# Altium PCB GC2USB.PcbDoc
Units mm, origin at the board's own origin, x right, y up, seen from the top; angles counter-clockwise.
Board outline 71.1 x 32.4 mm, 4 copper layers (Top, MidLayer1, MidLayer2, Bottom), stack 1.784 mm thick; 39 components, 23 nets, 154 pads, 49 vias.
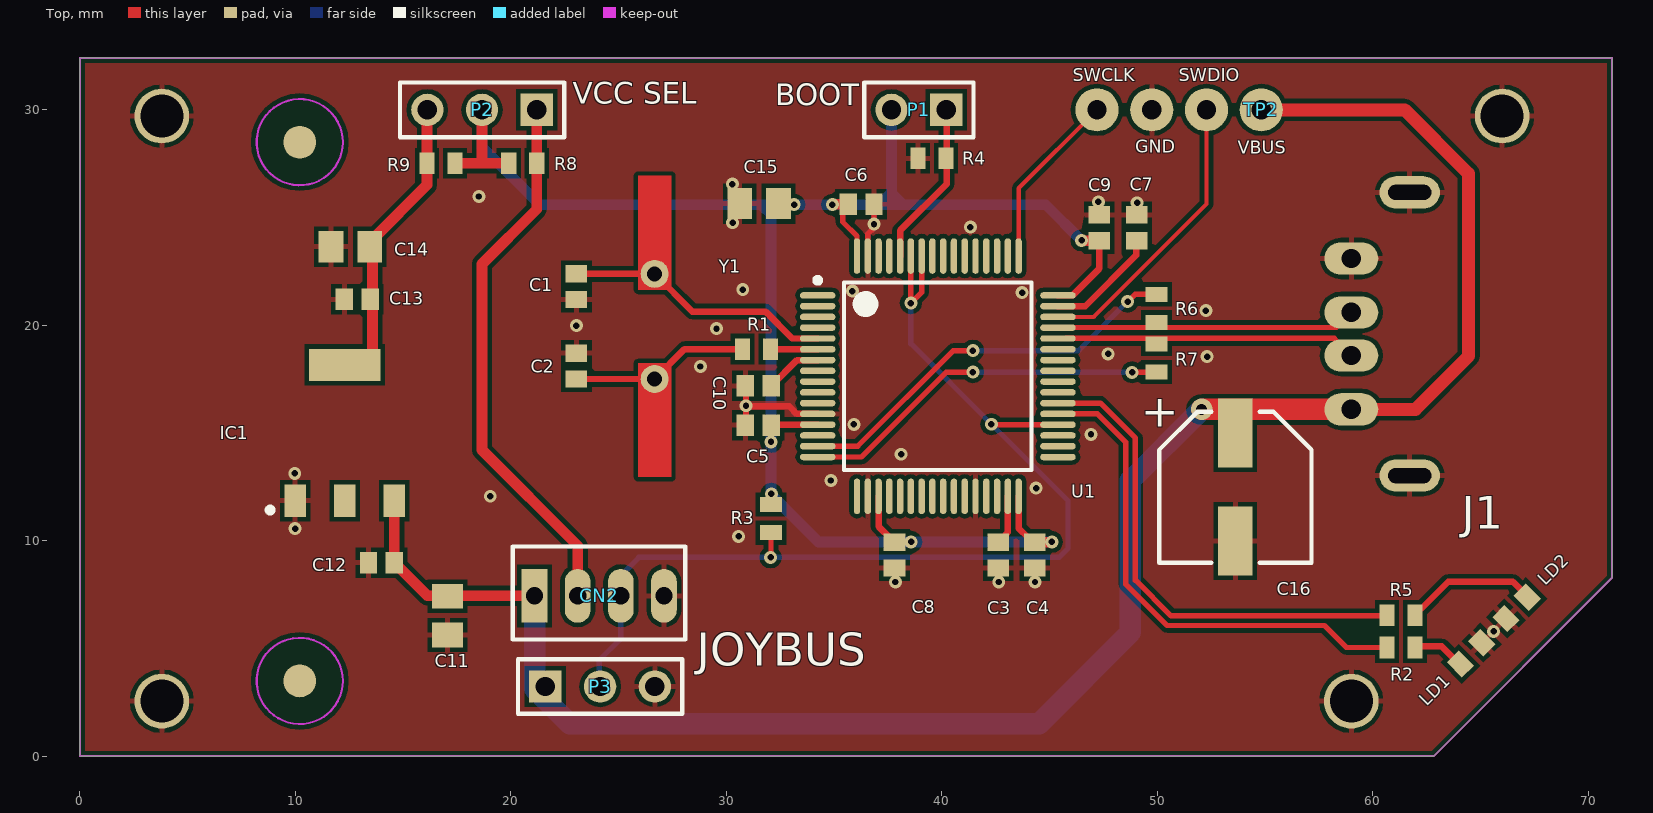
[diagram p0: Top view]
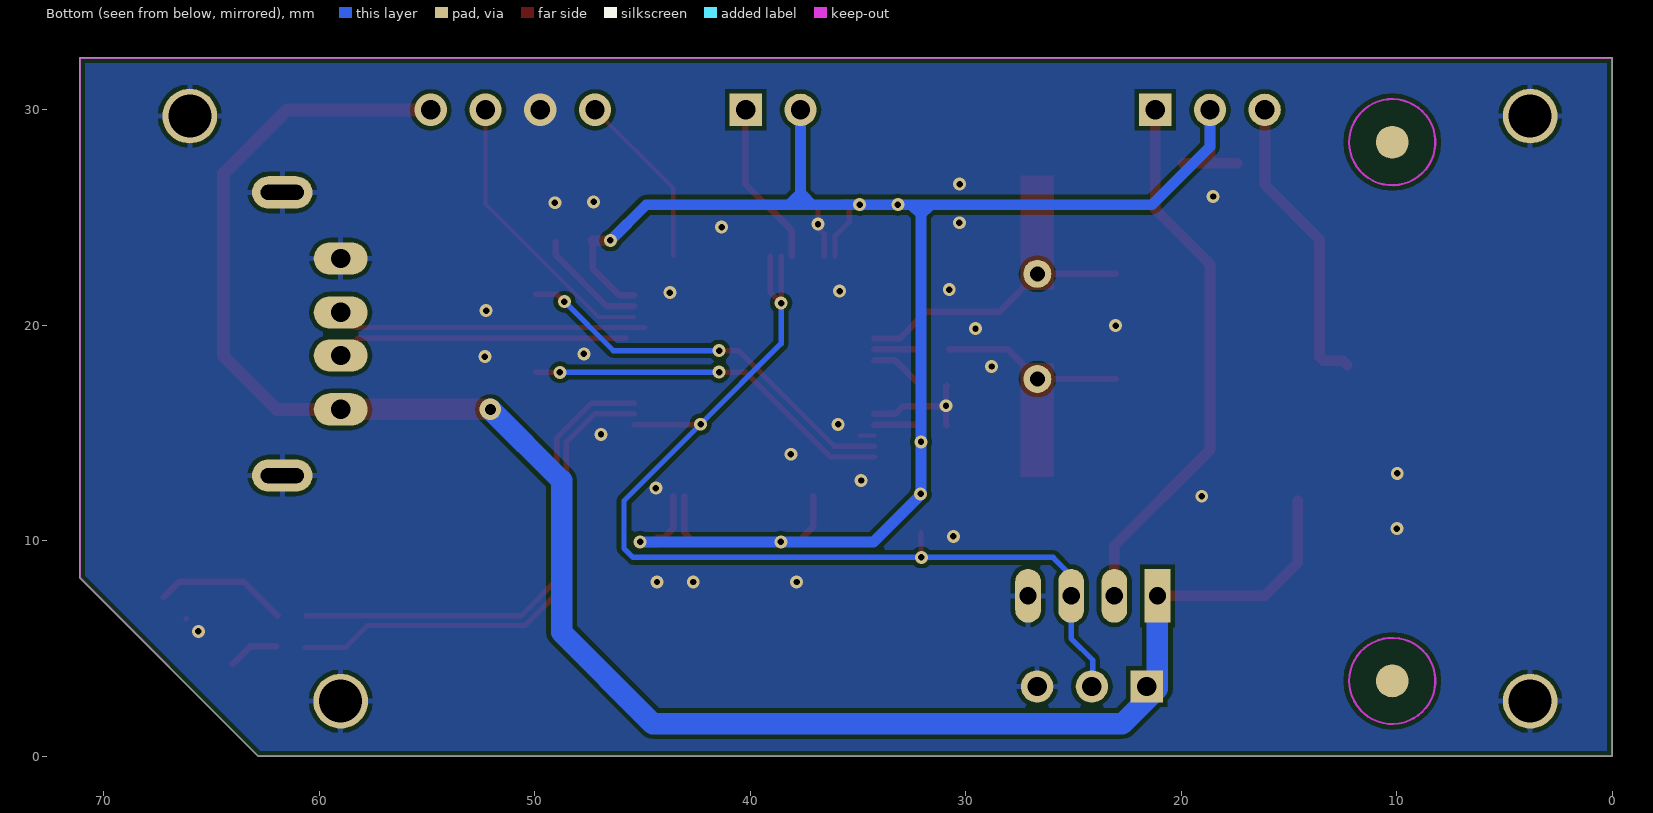
[diagram p1: Bottom view, seen from below]
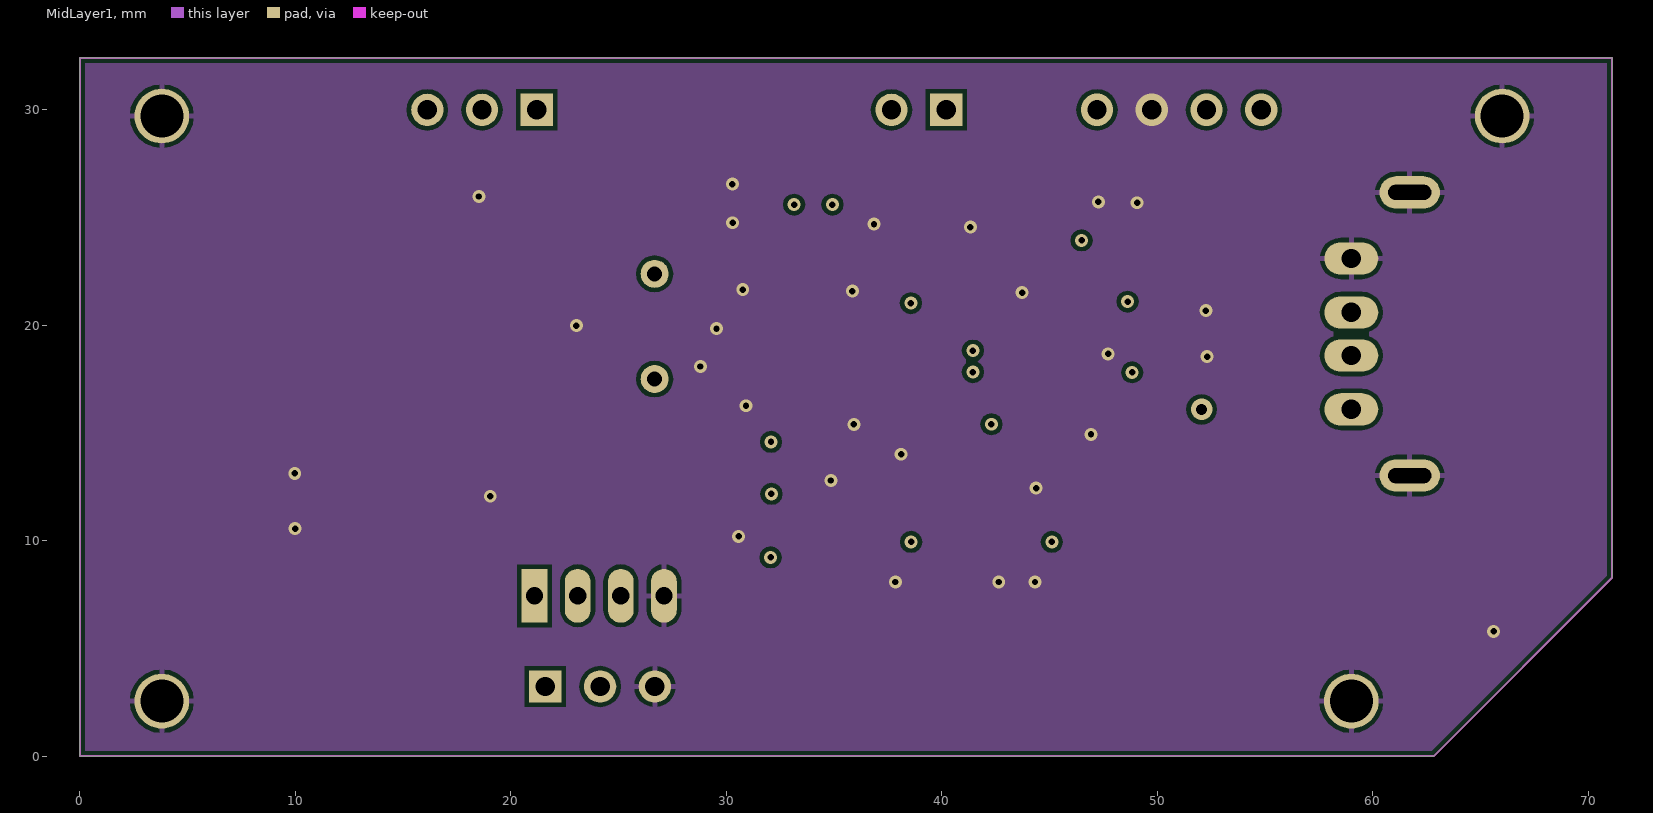
[diagram p2: MidLayer1]
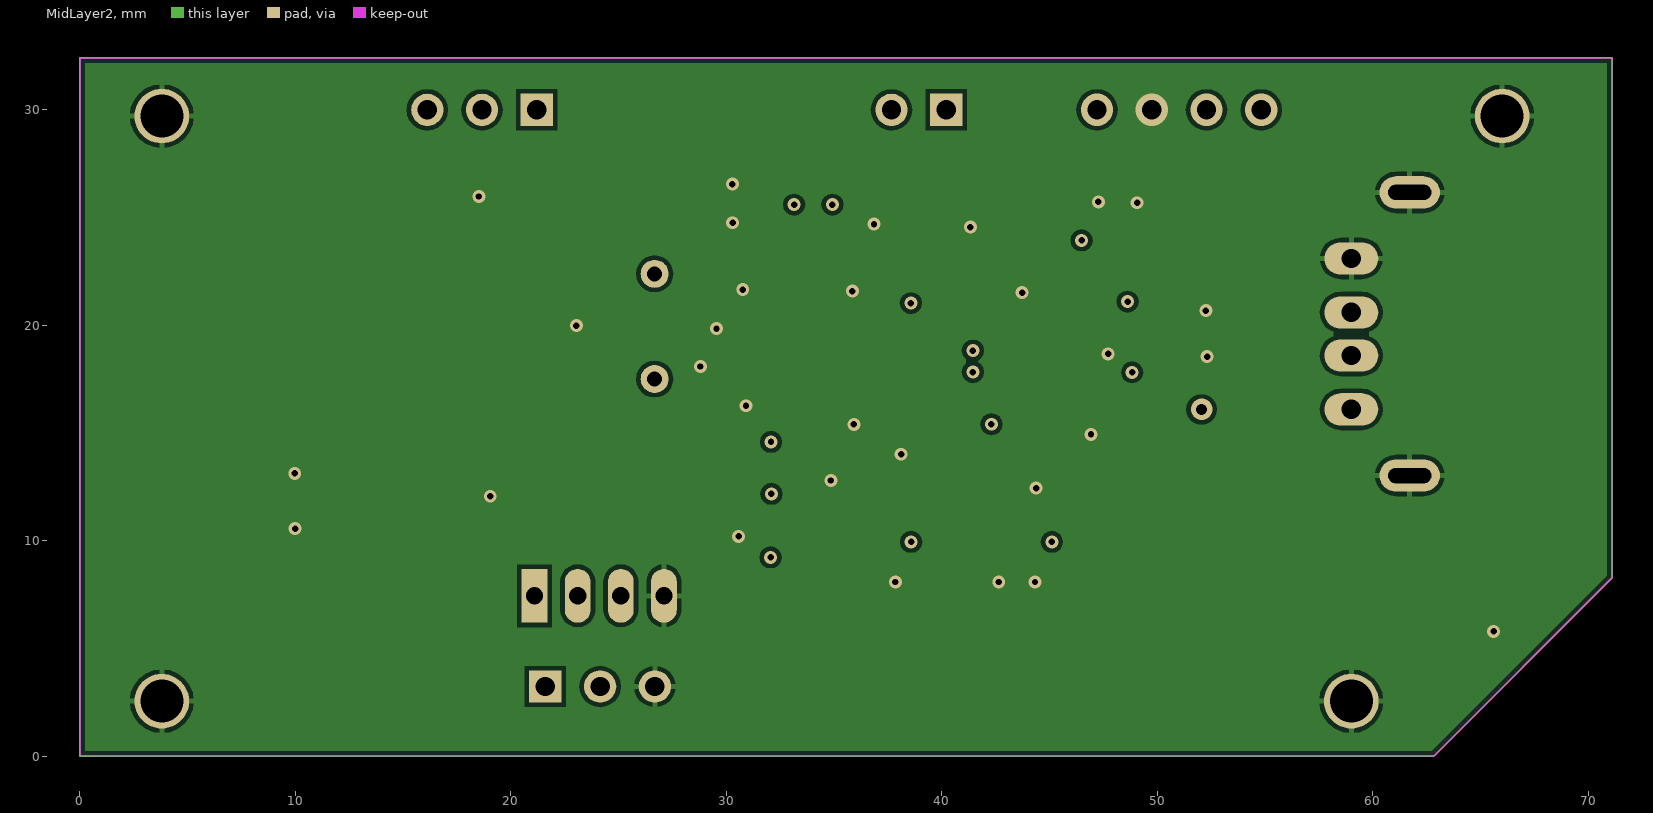
[diagram p3: MidLayer2]

## Layer stack, top to bottom
Top: signal copper 0.036
Dielectric: core 1, FR-4, Dk 4.8
MidLayer1: signal copper 0.036
Dielectric: prepreg 0.32, FR-4, Dk 4.8
MidLayer2: signal copper 0.036
Dielectric: core 0.32, FR-4, Dk 4.8
Bottom: signal copper 0.036

## Board outline
0,0 62.83,0 71.1,8.27 71.1,32.4 0,32.4

## Design rules (kind name [scope] priority, off if disabled: settings)
Clearance Clearance_Power_or_GND_to_All [(InNetClass('Power') OR InNetClass('Gnd'))] p1: gap=0.2
Clearance Clearance_Poly [InPoly vs IsPad or IsTrack Or IsVia] p2: gap=0.2
Clearance "Clearance_PAD_ to_PAD" [(IsPad) vs (IsPad)] p3: gap=0.2
Clearance "Clearance_Power_ to_GND" [InNetClass('Power') vs InNetClass('GND')] p4: gap=0.2
Clearance [All] p5: gap=0.2
ComponentClearance [All] p1: gap=0 collisioncheckmode=3 verticalgap=0.254 showdistances=FALSE
DiffPairsRouting [All] p1: maxlimit=0.254 minlimit=0.254 mostfreqgap=0.254 maxuncoupledlength=12.7
FabricationTestPointUsage TestPointUsage [All] p1: valid=0 allowmultiple=FALSE
FabricationTestpoint Testpoint [(IsPad And (OnTopLayer Or OnBottomLayer))] p1: side=3 testpointundercomponent=TRUE minsize=1.016 maxsize=2.54 preferedsize=1.524 minholesize=0 maxholesize=1.016 preferedholesize=0.813 testpointgrid=0.025 allowsidetop=TRUE allowsidebottom=TRUE usegrid=TRUE gridtolerance=0
FanoutControl Fanout_BGA [IsBGA] p1: bgadir=Out bgaviamode=Centered fanoutstyle=Auto fanoutdirection=OutOnly viagrid=0.025 // Fanout_BGA (Default Rule)
FanoutControl Fanout_LCC [IsLCC] p2: bgadir=Out bgaviamode=Centered fanoutstyle=Auto fanoutdirection=OutOnly viagrid=0.025 // Fanout_LCC (Default Rule)
FanoutControl Fanout_SOIC [IsSOIC] p3: bgadir=Out bgaviamode=Centered fanoutstyle=Auto fanoutdirection=OutOnly viagrid=0.025 // Fanout_SOIC (Default Rule)
FanoutControl Fanout_Small [(CompPinCount < 5)] p4: bgadir=Out bgaviamode=Centered fanoutstyle=Auto fanoutdirection=OutOnly viagrid=0.025 // Fanout_Small (Default Rule)
FanoutControl Fanout_Default [All] p5: bgadir=Out bgaviamode=Centered fanoutstyle=Auto fanoutdirection=OutOnly viagrid=0.025 // Fanout_Default (Default Rule)
HoleSize HoleSizeMount [(InPadClass('PAD_Mount'))] p1: absolutevalues=TRUE maxlimit=6.5 minlimit=2 maxpercent=80.000 minpercent=20.000
HoleSize [All] p2: absolutevalues=TRUE maxlimit=2 minlimit=0.5 maxpercent=80.000 minpercent=20.000
MinimumAnnularRing "MinimumAnnularRing_HoleSize < 0.7" [HoleSize < 0.7] p1: minimumring=0.05
MinimumAnnularRing "MinimumAnnularRing_HoleSize >= 0.7" [HoleSize >= 0.7] p2: minimumring=0.15
PolygonConnect PolygonConnect_1 [(IsVia)] p1: connectstyle=Direct reliefconductorwidth=0.254 reliefentries=4 polygonreliefangle="90 Angle"
PolygonConnect [All] p2: connectstyle=Relief reliefconductorwidth=0.254 reliefentries=4 polygonreliefangle="90 Angle"
RoutingLayers RoutingLayers_TOP [(InNet('D_P') OR InNet('D_N') OR InNet('X0') OR InNet('X1') OR InNet('X2') OR InNet('X3') OR InNet('X4') OR InNet('X5'))] p1: top layer_v5=TRUE mid layer 1_v5=TRUE mid layer 2_v5=TRUE bottom layer_v5=FALSE
RoutingLayers [All] p2: top layer_v5=TRUE mid layer 1_v5=TRUE mid layer 2_v5=TRUE bottom layer_v5=TRUE
RoutingVias RoutingVias_Power_or_GND [(InNetClass('Power') OR InNetClass('Gnd'))] p1: holewidth=0.7 width=1 viastyle="Through Hole" minholewidth=0.5 minwidth=0.7 maxholewidth=1 maxwidth=1.5
RoutingVias [All] p2: holewidth=0.5 width=0.8 viastyle="Through Hole" minholewidth=0.3 minwidth=0.5 maxholewidth=0.3 maxwidth=0.5
SMDNeckDown [All] p1: percent=60.000
SilkscreenOverComponentPads [All] p1: minsilkscreentomaskgap=0.254
SolderMaskExpansion [All] p1: expansion=0.102
UnRoutedNet UnRoutedNet_1 [All] p1:
UnRoutedNet [All] p2:
ViasUnderSMD [All] p1: allowed=TRUE
Width GNDK [InNet('GNDK')] p1: maxlimit=3 minlimit=0.3 preferedwidth=1
Width GND [InNetClass('GND')] p2: maxlimit=1.5 minlimit=0.15 preferedwidth=1 toplayer_prefwidth=0.2 bottomlayer_prefwidth=0.2 minimp=50.000000 maximp=50.000000 favimp=50.000000
Width Power [InNetClass('Power')] p3: maxlimit=1 minlimit=0.15 preferedwidth=0.5 toplayer_prefwidth=0.2 bottomlayer_prefwidth=0.2 minimp=50.000000 maximp=50.000000 favimp=50.000000
Width [All] p4: maxlimit=1 minlimit=0.15 preferedwidth=0.3
15 further rules are at their usual default settings.

## Classes and differential pairs
pad class PAD_Mount: Free-M6-3.3
pad class PAD_GF: Free-GF
net class Gnd: GND GNDA GNDK
net class Gndk: GNDK
net class Power: +5V AVDD2 AVDD3 DVDD2 DVDD3 VBUS
differential pair D: +D_P -D_N

## Components (designator, comment, footprint, x,y, rotation, side; value= is the part's Value field where it differs from the comment)
C1 "CAP-NP" C0603 23.04,21.79 r90 top
C2 "CAP-NP" C0603 23.04,18.1 r90 top
C3 "CAP-NP" C0603 42.61,9.33 r270 top
C4 "CAP-NP" C0603 44.31,9.33 r90 top
C5 "CAP-NP" C0603 31.48,15.36 r180 top
C6 "CAP-NP" C0603 36.25,25.61 r180 top
C7 "CAP-NP" C0603 49.05,24.52 r90 top
C8 "CAP-NP" C0603 37.8,9.33 r270 top
C9 "CAP-NP" C0603 47.3,24.52 r270 top
C10 "CAP-NP" C0603 31.48,17.18 r180 top
C11 "CAP-NP" C0805 17.06,6.52 r270 top
C12 "CAP-NP" C0603 13.99,8.98 r180 top
C13 "CAP-NP" C0603 12.87,21.2 r180 top
C14 "CAP-NP" C0805 12.55,23.64 r180 top
C15 "CAP-NP" C0805 31.52,25.64 r0 top
C16 "220uF 10V" D-7MM 53.62,12.49 r0 top
CN2 "JOYBUS" 4pin-header-2mm 21.1,7.44 r90 top
GND "TP" TP-SMD-2mm#1 51.15,29.99 r90 top locked
IC1 "VREG_1117-3V3" SOT223 12.29,14.9 r0 top
J1 "USBA-FEMALE-TH" USBA-FEMALE-THR-HOLE 61.7,19.59 r270 top locked
LD1 "RED-LED" 0603 64.56,4.77 r45 top
LD2 "BLUE-LED" 0603 66.67,6.88 r225 top
P1 "BOOT" HDR1X2 40.2,29.99 r180 top
P2 "VCC SEL" HDR1X3 21.2,29.99 r180 top
P3 "*" HDR1X3 21.6,3.23 r0 top
R1 "RES" R0603 31.4,18.89 r0 top
R2 "RES" R0603 61.3,5.04 r180 top
R3 "RES" R0603 32.07,11.02 r90 top
R4 "RES" R0603 39.54,27.74 r180 top
R5 "RES" R0603 61.3,6.53 r180 top
R6 "1K" R0603 49.96,20.78 r90 top
R7 "1K" R0603 49.96,18.47 r270 top
R8 "NM/0R" R0603 20.55,27.51 r180 top
R9 "NM/0R" R0603 16.76,27.51 r180 top
SWCLK "TP" TP-SMD-2mm#2 48.19,29.99 r90 top locked
SWDIO "TP" TP-SMD-2mm#3 54.21,29.99 r90 top locked
TP2 "VBUS" TP-SMD-2mm#4 58.93,29.99 r0 top locked
U1 "STM32F415RGT6" STM-TQFP64 39.81,17.63 r0 top locked
Y1 "XTAL-2P" HC49-THSMD 26.67,19.94 r180 top

## Footprints (in the part's own frame and the unit in brackets; to place one, negate y for a bottom-side part, rotate by r counter-clockwise, add the part's x,y. Pads: shape width x height; smd on the part's side, far side on the other; paste and mask are expansions set on the pad)
4pin-header-2mm [mm]
  rect 2.5x1.2 hole 0.8: 1(0,0)
  oval 2.5x1.2 hole 0.8: 2(0,-2) 3(0,-4) 4(0,-6)
  silkscreen extent -2.03,-6.98 2.29,1.02
0603 [mm]
  rect 0.8x1 smd: A(-0.7,0) C(0.7,0)
  body extent -1.19,-1.18 1.19,1.21, height 0.75
C0603 [mm]
  rect 0.8x1 smd: 1(-0.6,0) 2(0.6,0)
  body extent -0.87,-0.48 0.87,0.48, height 0.95
C0805 [mm]
  rect 1.15x1.45 smd: 1(-0.9,0) 2(0.9,0)
  body extent -1.07,-0.7 1.07,0.7, height 1.35
D-7MM [mm]
  rect 1.6x3.2 smd: 1(0,2.5) 2(0,-2.5)
  silkscreen extent -3.54,-3.52 3.53,3.49, body extent -3.3,-3.5 3.3,3.5, height 5.4
HC49-THSMD [mm]
  round 1.3 hole 0.7: 1(0,2.44) 2(0,-2.44)
  Top region: -0.762,-1.7 0.762,-1.7 0.762,-6.985 -0.762,-6.985
  Top region: -0.762,6.985 0.762,6.985 0.762,1.7 -0.762,1.7
  body extent -2.25,-6.21 2.25,6.09, height 5.18
HDR1X2 [mm] "Connector; Header; 2 Position"
  rect 1.5x1.5 hole 0.9: 1(0,0)
  round 1.5 hole 0.9: 2(2.54,0)
  silkscreen extent -1.27,-1.27 3.81,1.27
HDR1X3 [mm] "Connector; Header; 3 Position"
  rect 1.5x1.5 hole 0.9: 1(0,0)
  round 1.5 hole 0.9: 2(2.54,0) 3(5.08,0)
  silkscreen extent -1.27,-1.27 6.35,1.27
R0603 [mm]
  rect 0.7x1 smd: 1(-0.65,0) 2(0.65,0)
  body extent -0.82,-0.48 0.82,0.48, height 0.5
SOT223 [mm] "SOT223"
  rect 1x1.5 smd: 1(-2.3,-3.048) 2(0,-3.048) 3(2.3,-3.048)
  rect 3.3x1.5 smd: 4(0,3.252)
  silkscreen extent -3.59,-3.6 -3.34,-3.36, body extent -3.23,-3.29 3.27,3.6, height 1.7
STM-TQFP64 [mm] "TSQFP, 64-Leads, Body 12.0x12.0mm (max), Pitch 0.50mm, IPC Medium Density"
  oval 1.65x0.3 smd: 1(-5.575,3.75) 2(-5.575,3.25) 3(-5.575,2.75) 4(-5.575,2.25) 5(-5.575,1.75) 6(-5.575,1.25) 7(-5.575,0.75) 8(-5.575,0.25) 9(-5.575,-0.25) 10(-5.575,-0.75) 11(-5.575,-1.25) 12(-5.575,-1.75) 13(-5.575,-2.25) 14(-5.575,-2.75) 15(-5.575,-3.25) 16(-5.575,-3.75) 33(5.575,-3.75) 34(5.575,-3.25) 35(5.575,-2.75) 36(5.575,-2.25) 37(5.575,-1.75) 38(5.575,-1.25) 39(5.575,-0.75) 40(5.575,-0.25) 41(5.575,0.25) 42(5.575,0.75) 43(5.575,1.25) 44(5.575,1.75) 45(5.575,2.25) 46(5.575,2.75) 47(5.575,3.25) 48(5.575,3.75)
  oval 0.3x1.65 smd: 17(-3.75,-5.575) 18(-3.25,-5.575) 19(-2.75,-5.575) 20(-2.25,-5.575) 21(-1.75,-5.575) 22(-1.25,-5.575) 23(-0.75,-5.575) 24(-0.25,-5.575) 25(0.25,-5.575) 26(0.75,-5.575) 27(1.25,-5.575) 28(1.75,-5.575) 29(2.25,-5.575) 30(2.75,-5.575) 31(3.25,-5.575) 32(3.75,-5.575) 49(3.75,5.575) 50(3.25,5.575) 51(2.75,5.575) 52(2.25,5.575) 53(1.75,5.575) 54(1.25,5.575) 55(0.75,5.575) 56(0.25,5.575) 57(-0.25,5.575) 58(-0.75,5.575) 59(-1.25,5.575) 60(-1.75,5.575) 61(-2.25,5.575) 62(-2.75,5.575) 63(-3.25,5.575) 64(-3.75,5.575)
  silkscreen extent -5.7,-4.35 4.35,4.57, body extent -6,-6 6,6, height 1.2
TP-SMD-2mm#1 [mm] "TP"
  round 2 smd: 1(0,1.41)
TP-SMD-2mm#2 [mm] "TP"
  round 2 smd: 1(0,0.99)
TP-SMD-2mm#3 [mm] "TP"
  round 2 smd: 1(0,1.93)
TP-SMD-2mm#4 [mm] "TP"
  round 2 smd: 1(-4.11,0)
USBA-FEMALE-THR-HOLE [mm]
  oval 1.5x2.5 hole 0.9: 1(-3.5,-2.7) 2(-1,-2.7) 3(1,-2.7) 4(3.5,-2.7)
  oval 1.5x2.8 hole 0.7 slot 2 at 90 deg: 5(-6.57,0.01) 5(6.57,0.01)
  body extent -8.12,-3.72 8.12,10.28, height 7.62

## Part data
C1 C2 C3 C4 C5 C6 C7 C8 C9 C10 C12 C13: library part C0603, "capacitor"
C11 C14 C15: library part C0805, "capacitor"
C16: library part CAP-P-SMD, "polarized capacitor"
CN2: library part USB_PCBCON, "USB_PCBCON"
GND SWCLK SWDIO TP2: library part TP-SMD-2mm, "Testpoint"
IC1: library part VREG_1117, "VREG_1117"
J1: library part USBA-FEMALE-THR-HOLE, "USBA-FEMALE-THR-HOLE"
LD1: library part RED-LED-SMD
LD2: library part BLUE-LED-SMD
P1: library part "Header 2", "Header, 2-Pin"
P2 P3: library part "Header 3", "Header, 3-Pin"
R1 R2 R3 R4 R5 R6 R7 R8 R9: library part R0603, "Resistor"
Y1: "Crystal Oscillator"

## Free pads (board coordinates)
  round 1.524 smd: GF(10.2,3.49) GF(10.2,28.49)
  round 1.524 smd far side: GF(10.2,3.49) GF(10.2,28.49)
  round 2.54 hole 2: M(3.8,2.55) M(3.8,29.7) M(59,2.55) M(66,29.7)

## Via types
v1: diameter 0.6, hole 0.3, Top to Bottom, tented both sides, 44 vias
v2: diameter 1.5, hole 0.9, Top to Bottom, 4 vias
v3: diameter 1, hole 0.5, Top to Bottom, tented both sides, 1 vias

## Nets (pads, with @x,y where several pads share a name; then routed paths per layer and width w, separated by ;. In a path a pad name is that pad's centre, name@x,y a point inside that pad or via, vN(x,y) a via of type N, cw(c..) or ccw(c..) an arc to the next point about the centre after c; other vN are vias at no path point)
BOOT0: P1.1 R4.1 U1.60 | length 7.6
  Top w0.3: U1.60 38.06,24.39 40.22,26.55 P1.1@40.22,29.92
D_N: J1.3 R7.1 U1.44 | length 13.6
  Top w0.25: U1.44@45.76,19.386 58.204,19.386 J1.3
D_P: J1.2 R6.1 U1.45 | length 14.4
  Top w0.25: U1.45@44.89,19.89 58.3,19.89 J1.2 ; U1.45 U1.45@45.389,19.884
DATA: CN2.3 P3.2 R3.1 U1.36 U1.58 U1.59 | length 50.1
  Top w0.25: v1(32.05,9.22) 32.07,9.24 R3.1 ; U1.59 v1(38.56,21.02) 39.06,21.52 U1.58 ; v1(42.3,15.4) 42.32,15.38 U1.36
  Bottom w0.25: P3.2 24.1,3.27 24.1,4.46 25.1,5.46 CN2.3 25.1,8.38 25.94,9.22 v1(32.05,9.22) 45.43,9.22 45.85,9.64 45.85,11.85 v1(42.3,15.4) 38.56,19.14 v1(38.56,21.02)
GND: C1.1 C2.2 C3.2 C4.1 C5.2 C6.1 C7.2 C8.2 C9.1 C10.2 C11.2 C12.2 C13.2 C14.2 C15.1 C16.2 CN2.4 GND.1 IC1.1 J1.1 J1.5 LD1.C LD2.C P3.3 pad.M R4.2 U1.12 U1.18 U1.28 U1.63 | length 7.8
  Top w0.25: U1.63 36.56,24.22 36.85,24.51 C6.1 ; LD2.C@66.175,6.375 LD2.C
  Top w0.3: C5.2 30.91,15.39 v1@30.91,16.23 ; C10.2 30.91,17.15 v1@30.91,16.23 ; U1.12 33.26,15.88 32.91,16.23 v1@30.91,16.23
  other v1: 65.6,5.79 37.84,8.08 42.64,8.08 44.32,8.08 30.57,10.2 9.99,10.56 19.04,12.06 44.37,12.44 34.85,12.79 9.97,13.12 38.11,14.01 46.92,14.93 35.92,15.39 30.91,16.26 28.79,18.08 52.31,18.54 47.71,18.67 29.54,19.84 23.04,19.98 52.25,20.67 43.72,21.51 35.85,21.58 30.76,21.65 41.32,24.55 36.85,24.69 30.29,24.75 49.06,25.68 47.26,25.72 18.51,25.97 30.28,26.54
  other v2: 49.74,29.99
LED1: R2.2 U1.37 | length 23.6
  Top w0.25: U1.37 47.22,15.88 48.53,14.57 48.53,7.984 50.454,6.06 57.75,6.06 58.77,5.04 R2.2@60.67,5.04
LED2: R5.2 U1.38 | length 23.2
  Top w0.25: U1.38 47.356,16.38 48.98,14.756 48.98,8.17 50.64,6.51 R5.2@60.59,6.51
NetC2_1: C2.1 R1.1 Y1.1 | length 8.3
  Top w0.3: C2.1 Y1.1 28.06,18.89 R1.1
NetLD1_A: LD1.A R2.1 | length 2.3
  Top w0.3: R2.1@62,5.09 63.2,5.09 LD1.A@64,4.29
NetLD2_A: LD2.A R5.1 | length 6.2
  Top w0.3: R5.1@61.92,6.51 63.5,8.09 66.5,8.09 LD2.A@67.2,7.39
RST: C10.1 U1.7 | length 2.7
  Top w0.3: C10.1 33.28,18.38 U1.7
SWCLK: SWCLK.1 U1.49 | length 8.3
  Top w0.2: U1.49 43.56,26.35 v2(47.2,29.99)
SWDIO: SWDIO.1 U1.46 | length 13.4
  Top w0.2: U1.46 47.04,20.38 52.28,25.62 v2(52.28,29.99)
USB_N: R7.2 U1.16 | length 17.4
  Top w0.25: U1.16 36.27,13.88 40.21,17.82 v1(41.44,17.82) ; v1(48.83,17.81) 48.84,17.82 R7.2
  Bottom w0.25: v1(41.44,17.82) 48.82,17.82 v1(48.83,17.81)
USB_P: R6.2 U1.15 | length 18.6
  Top w0.25: U1.15 36.09,14.38 40.53,18.82 v1(41.44,18.82) ; v1(48.62,21.09) 48.96,21.43 R6.2
  Bottom w0.25: v1(41.44,18.82) 46.35,18.82 v1(48.62,21.09)
VBUS: C11.1 C12.1 C16.1 CN2.1 IC1.3 J1.4 P3.1 TP2.1 | length 88.8
  Top w0.5: IC1.3 C12.1 16.13,7.44 CN2.1
  Top w0.6: v2(54.82,29.99) 61.48,29.99 64.44,27.03 64.44,18.56 61.97,16.09 J1.4
  Top w1: v3(52.05,16.09) J1.4
  Bottom w1: CN2.1 21.1,3.13 22.72,1.51 44.51,1.51 48.75,5.75 48.75,12.79 v3(52.05,16.09)
VCAP1: C3.1 U1.31 | length 2
  Top w0.3: C3.1@42.86,10.18 43.06,10.38 U1.31
VCAP2: C7.1 U1.47 | length 5.2
  Top w0.3: U1.47 46.65,20.88 49.01,23.24 C7.1@49.01,23.87
VDD: C4.2 C5.1 C6.2 C8.1 C9.2 C15.2 P1.2 P2.2 R3.2 R8.2 R9.1 U1.13 U1.19 U1.32 U1.48 U1.64 | length 83.5
  Top w0.25: C6.2 35.4,25.36 35.4,24.79 36.06,24.13 U1.64
  Top w0.3: C5.1@32.36,15.38 U1.13 ; U1.19 37.06,10.66 C8.1@37.68,10.04 ; U1.32 43.56,10.58 44.01,10.13 C4.2@44.31,10.13 ; U1.48 46.06,21.38 47.31,22.63 C9.2@47.31,23.85
  Top w0.5: R9.1 18.66,27.51 ; P2.2 18.66,27.51 ; R8.2 18.66,27.51 ; v1(34.92,25.59) 34.94,25.61 C6.2 ; C4.2 45.09,9.93 v1(45.1,9.94) ; v1(46.48,23.93) 46.49,23.92 C9.2
  Bottom w0.5: P2.2 18.66,28.28 21.35,25.59 32.07,25.59 ; P1.2 37.66,25.59 ; v1(45.1,9.94) v1(38.57,9.94) 34.27,9.94 32.07,12.14 v1(32.07,14.58) 32.07,25.59 ; v1(46.48,23.93) 44.82,25.59 37.66,25.59 ; 32.07,25.59 v1(33.14,25.59) 34.82,25.59 34.87,25.54 v1(34.92,25.59) 37.66,25.59
  other v1: 32.09,12.17
VDD1: CN2.2 P2.1 R8.1 | length 25.4
  Top w0.5: P2.1 R8.1 21.2,25.38 18.66,22.84 18.66,14.2 23.1,9.76 CN2.2
VDD2: C13.1 C14.1 IC1.4 P2.3 R9.2 | length 14
  Top w0.5: IC1.4 12.488,18.35 13.4,18.35 13.58,18.53 13.58,23.98 16.11,26.51 R9.2 16.11,29.98 P2.3
XIN: C1.2 U1.5 Y1.2 | length 12.4
  Top w0.3: C1.2 23.05,22.38 Y1.2 28.42,20.63 31.81,20.63 33.06,19.38 U1.5
XOUT: R1.2 U1.6 | length 2.2
  Top w0.3: R1.2 32.06,18.88 U1.6
pads on no net: IC1.2 U1.1 U1.2 U1.3 U1.4 U1.8 U1.9 U1.10 U1.11 U1.14 U1.17 U1.20 U1.21 U1.22 U1.23 U1.24 U1.25 U1.26 U1.27 U1.29 U1.30 U1.33 U1.34 U1.35 U1.39 U1.40 U1.41 U1.42 U1.43 U1.50 U1.51 U1.52 U1.53 U1.54 U1.55 U1.56 U1.57 U1.61 U1.62
copper on no net: | length 0.7
  Top w0.2: 34.235,14.88 34.91,14.88

## Polygon pours and split planes (outlines as drawn)
GND on Top "top_gnd" (solid, remove dead copper, pour order 1001): -0.2,32.69 -0.2,-0.11 0.1,-0.41 0.2,-0.51 10.5,-0.51 63.8,-0.51 72.1,7.79 72.8,8.49 72.8,32.89 0,32.89 -0.2,32.69
GND on Bottom "bot_gnd" (solid, remove dead copper, pour order 1000): -0.3,32.59 -0.2,32.49 -0.2,-0.11 64.9,-0.11 72.2,7.19 72.7,7.69 72.7,32.79
GND on MidLayer1 "L01-GND" (solid, remove dead copper): -0.15,32.85 -0.46,32.54 -0.46,-0.32 63.55,-0.32 71.9,8.03 71.84,8.09 71.84,33.03
GND on MidLayer2 "L01-GND" (solid, remove dead copper): -0.46,-0.14 -0.46,32.97 -0.28,32.79 71.9,32.79 71.9,8.27 63.12,-0.51

## Keep-outs
Top:
  circle w0.1: c10.2,28.49 r2
  circle w0.1: c10.2,3.49 r2
Bottom:
  circle w0.1: c10.2,28.49 r2
  circle w0.1: c10.2,3.49 r2
Keep-Out Layer:
  the board outline again, w0.1

## Other copper
Bottom:
  region net VDD: 31.53,25.59 31.46,25.52 31.46,25.41 31.91,24.96 32.23,24.96 32.68,25.41 32.67,25.42 32.67,25.62
  region net VDD: 38.39,25.59 38.39,25.72 37.86,26.25 37.45,26.25 36.93,25.73 36.93,25.67

## Silkscreen, mask and mechanical layers (free items; w line width, h text height)
Mechanical 6:
  the board outline again, w0.2

## Text inside footprints (layer, text, board x,y; h text height)
C16: Top Overlay "+" at 50.98,16.57 h1.52 r180